# Allegro board hotpixel-routed.brd
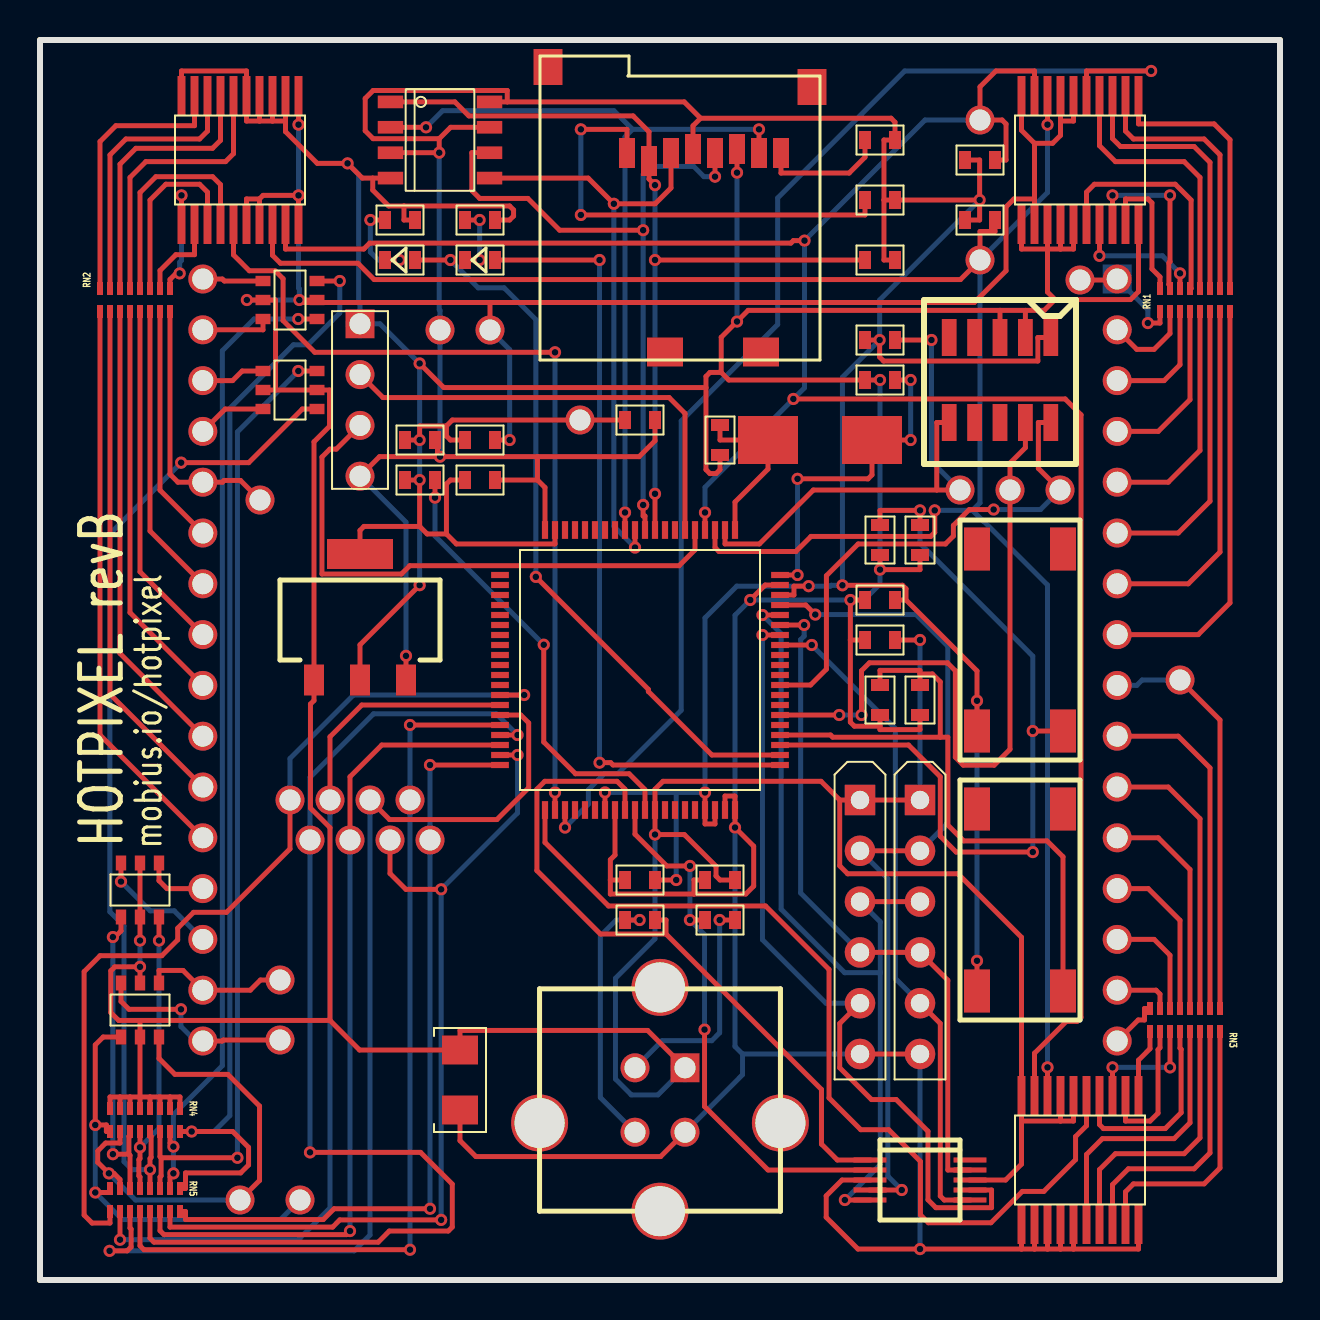
[diagram p0: board, top side]
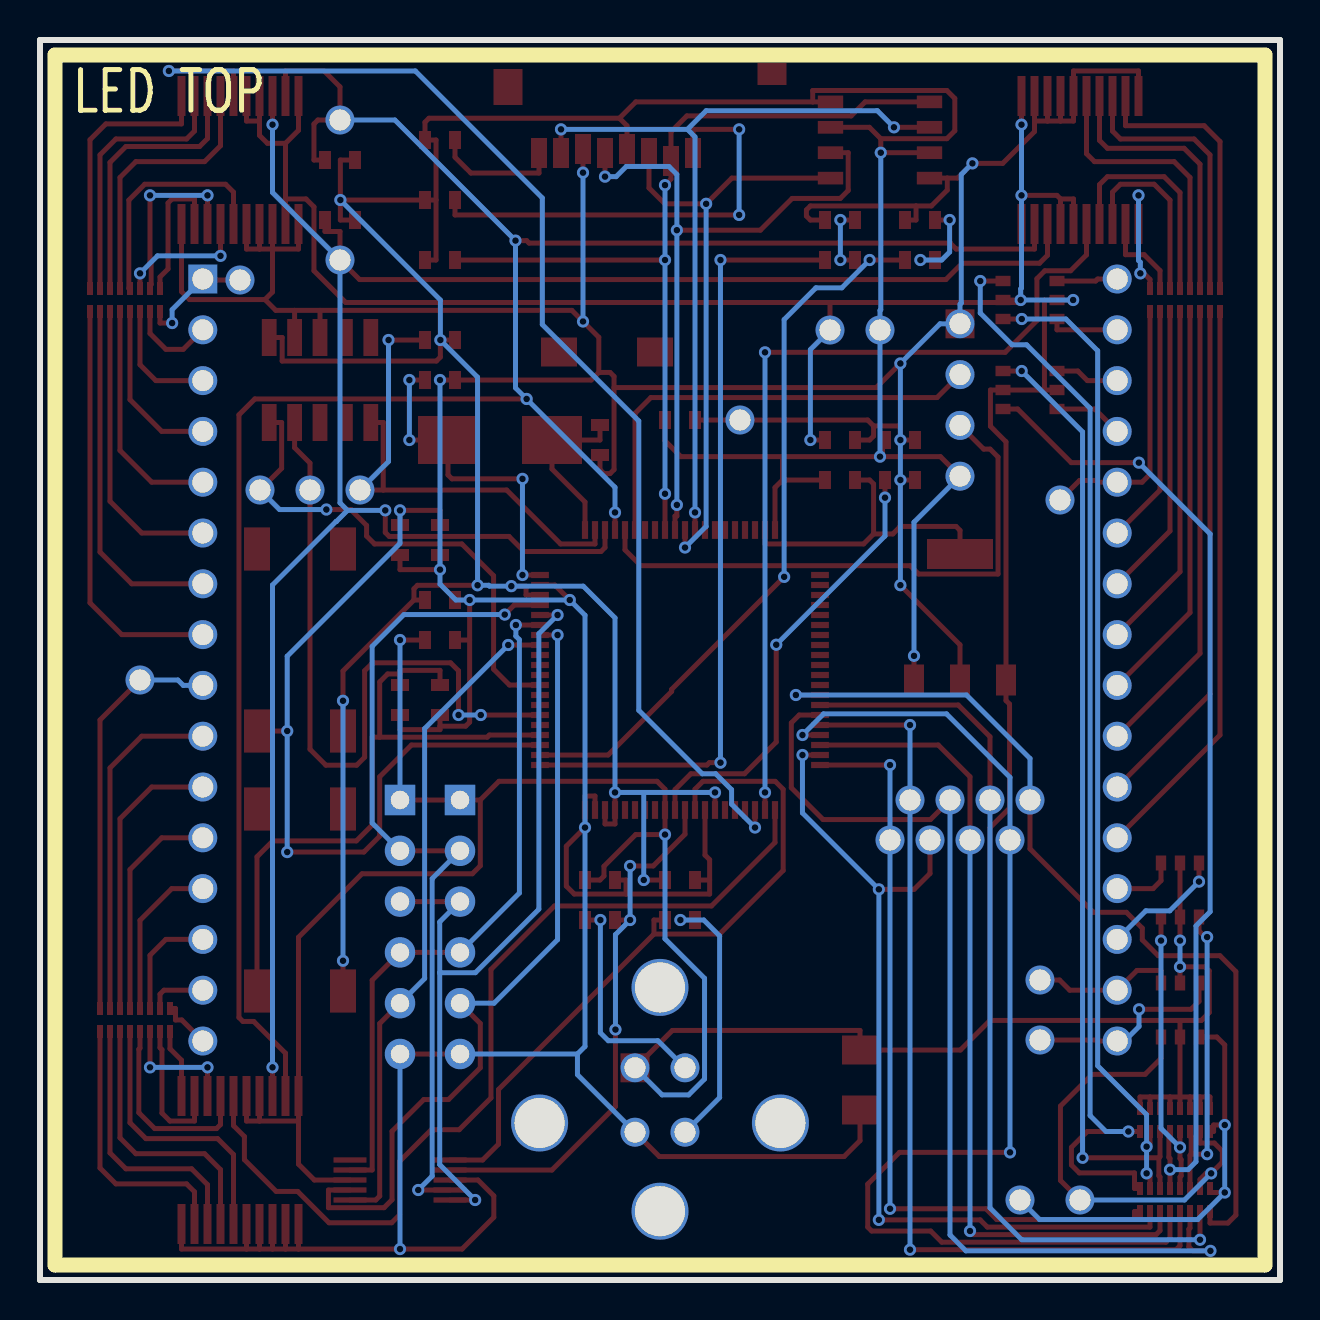
[diagram p1: board, bottom side, seen from below]

Outline 62 x 62 mm; copper layers: TOP, BOTTOM. Coordinates in mm from the lower left corner of the outline.
Outline path: 0,62 62,62 62,0 0,0 0,62

## Design rules (mm)
nets with their own width: min track width 0.37; nets 0 3V3 5V0

## Placement (name value [footprint] x y rotation side)
C1  1u  [C0603]  34 20 0 top
C2  1u  [C0603]  30 20 0 top
C3  1u  [C0603]  22 42 0 top
C4  1u  [C0603]  30 43 0 top
C5  1u  [C0603]  42 32 0 top
C6  1u  [C0603]  22 40 0 top
C7  0.1u  [C0603]  42 34 0 top
C8  0.1u  [C0603]  19 42 0 top
C9  1u  [C0603]  19 40 0 top
C10  0.1u  [C0603]  44 29 270 top
C11  0.1u  [C0603]  44 37 270 top
C12  22pF  [C0603]  42 45 180 top
C13  22pF  [C0603]  34 42 270 top
C14  10uF  [1206]  21 10 90 top
D1  GTM2088ARG-21  [GTM2088ARG21]  31 31 180 bottom
D7  LED  [D0603]  22 51 0 top
D8  LED  [D0603]  18 51 0 top
J2  SWD  [2X5_50MIL_JTAG]  48 45 0 top
J3  ADC  [4SIP]  16 44 0 top
J4  SPI_IN  [SIP6]  44 24 0 top
J5  SPI_OUT  [SIP6]  41 24 0 top
Q5  SI3911DV  [6TSOP]  5 13.5 90 top
Q6  SI3911DV  [6TSOP]  5 19.5 90 top
Q7  SI3911DV  [6TSOP]  12.5 44.5 180 top
Q8  SI3911DV  [6TSOP]  12.5 49 180 top
R1  2.2k  [R0603]  47 56 0 top
R2  2.2k  [R0603]  47 53 0 top
R3  10k  [R0603]  42 47 0 top
R4  300  [R0603]  22 53 0 top
R5  300  [R0603]  18 53 0 top
R6  10k  [R0603]  42 29 270 top
R7  10k  [R0603]  42 37 270 top
R8  33  [R0603]  30 18 0 top
R9  33  [R0603]  34 18 0 top
R11  10k  [R0603]  42 57 0 top
R12  10k  [R0603]  42 51 0 top
R13  10k  [R0603]  42 54 0 top
RN1  56  [741X163]  56 49 90 top
RN2  56  [741X163]  3 49 90 top
RN3  100  [741X163]  59 13 270 top
RN4  4.7k  [741X163]  7 8 270 top
RN5  4.7k  [741X163]  7 4 270 top
SW1  USER1  [SMT_SW_4A]  49 32 90 top
SW2  USER2  [SMT_SW_4A]  49 19 90 top
TP1  TESTLOOP  [TPA]  12 12 0 top
TP11  TESTLOOP  [TPA]  27 43 0 top
TP12  TESTLOOP  [TPA]  22.5 47.5 0 top
TP13  TESTLOOP  [TPA]  20 47.5 0 top
TP14  TESTLOOP  [TPA]  12 15 0 top
TP15  TESTLOOP  [TPA]  57 30 0 top
TP16  TESTLOOP  [TPA]  11 39 0 top
TP17  TESTLOOP  [TPA]  52 50 0 top
TP18  TESTLOOP  [TPA]  10 4 0 top
TP19  TESTLOOP  [TPA]  13 4 0 top
TP20  TESTLOOP  [TPA]  47 58 0 top
TP21  TESTLOOP  [TPA]  47 51 0 top
TP22  TESTLOOP  [TPA]  19.5 22 0 top
TP23  TESTLOOP  [TPA]  17.5 22 0 top
TP24  TESTLOOP  [TPA]  15.5 22 0 top
TP25  TESTLOOP  [TPA]  13.5 22 0 top
TP26  TESTLOOP  [TPA]  18.5 24 0 top
TP27  TESTLOOP  [TPA]  16.5 24 0 top
TP28  TESTLOOP  [TPA]  14.5 24 0 top
TP29  TESTLOOP  [TPA]  12.5 24 0 top
TP30  TESTLOOP  [TPA]  51 39.5 0 top
TP31  TESTLOOP  [TPA]  48.5 39.5 0 top
TP32  TESTLOOP  [TPA]  46 39.5 0 top
U3  PCA9634PW-TSSOP20  [20TSSOP]  52 6 90 top
U4  PCA9634PW-TSSOP20  [20TSSOP]  10 56 270 top
U5  PCA9634PW-TSSOP20  [20TSSOP]  52 56 90 top
U6  MKL25Z128-80LQFP  [80LQFP]  30 30.5 90 top
U7  LM3940IMP-3.3-SOT-223-3  [SOT-223]  16 30 0 top
U8  USB_B-5788336  [5788336]  31 9 0 top
U10  25XX020-8SOIC  [8SOIC]  20 57 0 top
U11  AMP-101-00660-68-6  [AMP101_00660]  25 46 0 top
U12  PRTR5V0U8S-SOT552-1  [SOT-552-1]  44 5 0 top
X1  8MHz  [SMD2_5_0X3_2MM]  39 42 0 top

## Library data of the parts
C1-C14 = C
D1 = GTM2088ARG-21
D7 D8 = LED
J2 = CON10A
J3 = CON4
J4 J5 = CON6
Q5-Q8 = SI3911DV
R1-R9 R11-R13 = R
RN1-RN5 = R-PACK_0
SW1 SW2 = SW PUSHBUTTON-SPST
TP1 TP11-TP32 = TPA_0
U3-U5 = PCA9634PW-TSSOP20
U6 = MKL25Z128-80LQFP
U7 = LM3940IMP-3.3-SOT-223-3
U8 = USB_B-5788336
U10 = 25XX020-8SOIC
U11 = AMP-101-00660-68-6
U12 = PRTR5V0U8S-SOT552-1
X1 = QZP100K

## Footprints (pads in the part's own frame, mm; a bottom-side part is the same pattern mirrored in y, then rotated)
2X5_50MIL_JTAG
  round 0 hole 1.1 unplated: (-1.9,0) (1.9,0)
  rect 0.74x1.85 smd: 1(2.54,2.125) 2(2.54,-2.125) 3(1.27,2.125) 4(1.27,-2.125) 5(0,2.125) 6(0,-2.125) 7(-1.27,2.125) 8(-1.27,-2.125) 9(-2.54,2.125) 10(-2.54,-2.125)
4SIP
  rect 1.45x1.45 hole 1.05: 1(0,3.81)
  round 1.45 hole 1.05: 2(0,1.27) 3(0,-1.27) 4(0,-3.81)
6TSOP
  rect 0.75x0.52 smd: 1(-1.35,0.95) 2(-1.35,0) 3(-1.35,-0.95) 4(1.35,-0.95) 5(1.35,0) 6(1.35,0.95)
8SOIC
  rect 1.27x0.635 smd: 1(-2.477,1.905) 2(-2.477,0.635) 3(-2.477,-0.635) 4(-2.477,-1.905) 5(2.477,-1.905) 6(2.477,-0.635) 7(2.477,0.635) 8(2.477,1.905)
20TSSOP
  rect 2x0.4 smd: 1(-3.2,2.925) 2(-3.2,2.275) 3(-3.2,1.625) 4(-3.2,0.975) 5(-3.2,0.325) 6(-3.2,-0.325) 7(-3.2,-0.975) 8(-3.2,-1.625) 9(-3.2,-2.275) 10(-3.2,-2.925) 11(3.2,-2.925) 12(3.2,-2.275) 13(3.2,-1.625) 14(3.2,-0.975) 15(3.2,-0.325) 16(3.2,0.325) 17(3.2,0.975) 18(3.2,1.625) 19(3.2,2.275) 20(3.2,2.925)
80LQFP
  rect 0.89x0.31 smd: 1(-7,4.75) 2(-7,4.25) 3(-7,3.75) 4(-7,3.25) 5(-7,2.75) 6(-7,2.25) 7(-7,1.75) 8(-7,1.25) 9(-7,0.75) 10(-7,0.25) 11(-7,-0.25) 12(-7,-0.75) 13(-7,-1.25) 14(-7,-1.75) 15(-7,-2.25) 16(-7,-2.75) 17(-7,-3.25) 18(-7,-3.75) 19(-7,-4.25) 20(-7,-4.75) 41(7,-4.75) 42(7,-4.25) 43(7,-3.75) 44(7,-3.25) 45(7,-2.75) 46(7,-2.25) 47(7,-1.75) 48(7,-1.25) 49(7,-0.75) 50(7,-0.25) 51(7,0.25) 52(7,0.75) 53(7,1.25) 54(7,1.75) 55(7,2.25) 56(7,2.75) 57(7,3.25) 58(7,3.75) 59(7,4.25) 60(7,4.75)
  rect 0.31x0.89 smd: 21(-4.75,-7) 22(-4.25,-7) 23(-3.75,-7) 24(-3.25,-7) 25(-2.75,-7) 26(-2.25,-7) 27(-1.75,-7) 28(-1.25,-7) 29(-0.75,-7) 30(-0.25,-7) 31(0.25,-7) 32(0.75,-7) 33(1.25,-7) 34(1.75,-7) 35(2.25,-7) 36(2.75,-7) 37(3.25,-7) 38(3.75,-7) 39(4.25,-7) 40(4.75,-7) 61(4.75,7) 62(4.25,7) 63(3.75,7) 64(3.25,7) 65(2.75,7) 66(2.25,7) 67(1.75,7) 68(1.25,7) 69(0.75,7) 70(0.25,7) 71(-0.25,7) 72(-0.75,7) 73(-1.25,7) 74(-1.75,7) 75(-2.25,7) 76(-2.75,7) 77(-3.25,7) 78(-3.75,7) 79(-4.25,7) 80(-4.75,7)
741X163
  rect 0.65x0.3 smd: 1(-0.575,0) 2(-0.575,-0.5) 3(-0.575,-1) 4(-0.575,-1.5) 5(-0.575,-2) 6(-0.575,-2.5) 7(-0.575,-3) 8(-0.575,-3.5) 9(0.575,-3.5) 10(0.575,-3) 11(0.575,-2.5) 12(0.575,-2) 13(0.575,-1.5) 14(0.575,-1) 15(0.575,-0.5) 16(0.575,0)
1206
  rect 1.45x1.8 smd: 1(-1.5,0) 2(1.5,0)
5788336
  round 2.85 hole 2.5: (-6.02,-1.15) (0,5.63) (0,-5.56) (6.02,-1.15)
  rect 1.45x1.45 hole 1.05: 1(1.25,1.61)
  round 1.45 hole 1.05: 2(-1.25,1.61) 3(-1.25,-1.61) 4(1.25,-1.61)
AMP101_00660
  rect 1.45x1.8 smd: (0.4,14.65) (13.6,13.65)
  rect 0.8x1.5 smd: 1(4.35,10.35) 2(5.45,9.95) 3(6.55,10.35) 4(7.65,10.55) 5(8.75,10.35) 6(9.85,10.55) 7(10.95,10.35) 8(12.05,10.35)
  rect 1.8x1.45 smd: 9(6.25,0.4) 10(11.05,0.4)
C0603
  rect 0.6x0.9 smd: 1(-0.75,0) 2(0.75,0)
D0603
  rect 0.6x0.9 smd: 1(-0.75,0) 2(0.75,0)
GTM2088ARG21
  round 1.45 hole 1.05: 1(-22.86,19.05) 2(-22.86,16.51) 3(-22.86,13.97) 4(-22.86,11.43) 5(-22.86,8.89) 6(-22.86,6.35) 7(-22.86,3.81) 8(-22.86,1.27) 9(-22.86,-1.27) 10(-22.86,-3.81) 11(-22.86,-6.35) 12(-22.86,-8.89) 13(-22.86,-11.43) 14(-22.86,-13.97) 15(-22.86,-16.51) 16(-22.86,-19.05) 17(22.86,-19.05) 18(22.86,-16.51) 19(22.86,-13.97) 20(22.86,-11.43) 21(22.86,-8.89) 22(22.86,-6.35) 23(22.86,-3.81) 24(22.86,-1.27) 25(22.86,1.27) 26(22.86,3.81) 27(22.86,6.35) 28(22.86,8.89) 29(22.86,11.43) 30(22.86,13.97) 31(22.86,16.51) 32(22.86,19.05)
R0603
  rect 0.6x0.9 smd: 1(-0.75,0) 2(0.75,0)
SIP6
  rect 1.524x1.524 hole 0.914: 1(0,0)
  round 1.524 hole 0.914: 2(0,-2.54) 3(0,-5.08) 4(0,-7.62) 5(0,-10.16) 6(0,-12.7)
SMD2_5_0X3_2MM
  rect 3x2.4 smd: 1(2.6,0) 2(-2.6,0)
SMT_SW_4A
  rect 2.16x1.3 smd: (4.55,2.15) (4.55,-2.15) 1(-4.55,2.15) 2(-4.55,-2.15)
SOT-223
  rect 1x1.55 smd: 1(-2.3,0) 2(0,0) 3(2.3,0)
  rect 3.3x1.5 smd: 4(0,6.3)
SOT-552-1
  rect 1.65x0.264 smd: 1(-2.5,1) 2(-2.5,0.5) 3(-2.5,0) 4(-2.5,-0.5) 5(-2.5,-1) 6(2.5,-1) 7(2.5,-0.5) 8(2.5,0) 9(2.5,0.5) 10(2.5,1)
TPA
  round 1.45 hole 1.05: 1(0,0)

## Nets
3V3: C2.2 C4.2 C6.2 C7.2 C8.2 J2.1 J3.4 R1.1 R2.1 R3.1 R11.2 R12.2 R13.2 SW1.1 SW2.1 TP13.1 U6.7(VDD_1) U6.17(VDDA) U6.18(VREFH) U6.38(VDD_2) U6.60(VDD_3) U7.3(OUT) U10.3(/WP) U10.7(/HOLD) U10.8(VDD) U11.4(VDD)
5V0: C1.2 C3.2 C5.2 C14.2 J4.1 J5.1 Q5.2(S2) Q5.5(S1) Q6.2(S2) Q6.5(S1) Q7.2(S2) Q7.5(S1) Q8.2(S2) Q8.5(S1) RN4.1 RN4.2 RN4.3 RN4.4 RN4.5 RN4.6 RN4.7 RN4.8 TP12.1 U3.16(A5) U3.17(A6) U3.20(VDD) U4.1(A0) U4.16(A5) U4.17(A6) U4.20(VDD) U5.2(A1) U5.16(A5) U5.17(A6) U5.20(VDD) U6.12(VREGIN) U7.1(IN) U8.1(5V) U12.8(VCC)
0: C1.1 C2.1 C3.1 C4.1 C5.1 C6.1 C7.1 C8.1 C9.1 C10.2 C11.2 C12.2 C13.2 C14.1 J2.3 J2.5 J3.1 J4.6 J5.6 R4.2 R5.2 R6.2 R7.2 TP11.1 U3.1(A0) U3.2(A1) U3.3(A2) U3.4(A3) U3.5(A4) U3.10(VSS) U4.2(A1) U4.3(A2) U4.4(A3) U4.5(A4) U4.10(VSS) U5.1(A0) U5.3(A2) U5.4(A3) U5.5(A4) U5.10(VSS) U6.8(VSS_1) U6.19(VREFL) U6.20(VSSA) U6.39(VSS_2) U6.59(VSS_3) U7.2(GND_1) U7.4(GND_2) U8.4(GND) U10.4(VSS) U11.6(VSS) U12.3(GND)
B1: RN1.13 U5.6(LED0)
B2: RN1.14 U5.7(LED1)
B3: RN1.15 U5.8(LED2)
B4: RN1.16 U5.9(LED3)
B5: RN1.9 U5.11(LED4)
B6: RN1.10 U5.12(LED5)
B7: RN1.11 U5.13(LED6)
B8: RN1.12 U5.14(LED7)
B_OE: U5.15(/OE) U6.3(PTE2)
G1: RN2.13 U4.6(LED0)
G2: RN2.14 U4.7(LED1)
G3: RN2.15 U4.8(LED2)
G4: RN2.16 U4.9(LED3)
G5: RN2.9 U4.11(LED4)
G6: RN2.10 U4.12(LED5)
G7: RN2.11 U4.13(LED6)
G8: RN2.12 U4.14(LED7)
G_OE: U4.15(/OE) U6.2(PTE1)
I2C0_SCL: R2.2 TP21.1 U3.18(SCL) U4.18(SCL) U5.18(SCL) U6.43(PTBO)
I2C0_SDA: R1.2 TP20.1 U3.19(SDA) U4.19(SDA) U5.19(SDA) U6.44(PTB1)
LED1: D7.2(ANODE) U6.21(PTE29)
LED2: D8.2(ANODE) U6.22(PTE30)
R1: RN3.13 U3.6(LED0)
R2: RN3.14 U3.7(LED1)
R3: RN3.15 U3.8(LED2)
R4: RN3.16 U3.9(LED3)
R5: RN3.9 U3.11(LED4)
R6: RN3.10 U3.12(LED5)
R7: RN3.11 U3.13(LED6)
R8: RN3.12 U3.14(LED7)
R_OE: U3.15(/OE) U6.1(PTE0)
RD1: D1.17(ROW1) Q5.6(D1) TP1.1
RD2: D1.18(ROW2) Q5.4(D2) TP14.1
RD3: D1.19(ROW3) Q6.6(D1)
RD4: D1.20(ROW4) Q6.4(D2)
RD5: D1.29(ROW5) Q7.6(D1)
RD6: D1.30(ROW6) Q7.4(D2)
RD7: D1.31(ROW7) Q8.6(D1)
RD8: D1.32(ROW8) Q8.4(D2)
ROW1: RN5.9 TP29.1 U6.73(PTD0)
ROW2: RN5.10 TP28.1 U6.74(PTD1)
ROW3: RN5.11 TP27.1 U6.75(PTD2)
ROW4: RN5.12 TP26.1 U6.76(PTD3)
ROW5: RN5.13 TP25.1 U6.77(PTD4)
ROW6: RN5.14 TP24.1 U6.78(PTD5)
ROW7: RN5.15 TP23.1 U6.79(PTD6)
ROW8: RN5.16 TP22.1 U6.80(PTD7)
SPI0_MISO: J4.2 J5.2 U6.37(PTA17) U12.4(ESD3)
SPI0_MOSI: J4.3 J5.3 U6.36(PTA16) U12.5(ESD4)
SPI0_PCS0: J5.5 U6.34(PTA14) U12.7(ESD6)
SPI0_SCK: J4.4 J5.4 U6.35(PTA15) U12.9(ESD7)
SPI0_SL_EN: J4.5 U6.33(PTA13) U12.6(ESD5)
SPI1_MISO: U6.52(PTB17) U10.2(SO) U11.7(DAT0)
SPI1_MOSI: U6.51(PTB16) U10.5(SI) U11.3(CMD)
SPI1_PCS0: R12.1 U6.49(PTB10) U10.1(/CE) U11.2(CD/DAT3)
SPI1_SCK: U6.50(PTB11) U10.6(SCK) U11.5(CLK)
SW1: C11.1 R7.1 SW1.2 U6.23(PTE31)
SW2: C10.1 R6.1 SW2.2 U6.24(PTE24)
SWD_CLK: J2.4 TP31.1 U6.26(PTA0)
SWD_DIO: J2.2 TP30.1 U6.29(PTA3)
SWD_RST: J2.10 R3.2 TP32.1 U6.42(RESET_B)
N01486: D1.9(RCOL1) RN3.1 TP15.1
N01490: D1.10(RCOL2) RN3.2
N01494: D1.11(RCOL3) RN3.3
N01498: D1.12(RCOL4) RN3.4
N01508: D1.13(RCOL5) RN3.5
N01512: D1.14(RCOL6) RN3.6
N01516: D1.15(RCOL7) RN3.7
N01520: D1.16(RCOL8) RN3.8
N01524: D1.28(GCOL1) RN2.8 TP16.1
N01528: D1.27(GCOL2) RN2.7
N01532: D1.26(GCOL3) RN2.6
N01536: D1.25(GCOL4) RN2.5
N01546: D1.24(GCOL5) RN2.4
N01550: D1.23(GCOL6) RN2.3
N01554: D1.22(GCOL7) RN2.2
N01558: D1.21(GCOL8) RN2.1
N01562: D1.1(BCOL1) RN1.1 TP17.1
N01566: D1.2(BCOL2) RN1.2
N01570: D1.3(BCOL3) RN1.3
N01574: D1.4(BCOL4) RN1.4
N01578: D1.5(BCOL5) RN1.5
N01582: D1.6(BCOL6) RN1.6
N01586: D1.7(BCOL7) RN1.7
N01590: D1.8(BCOL8) RN1.8
N13286: Q8.3(G2) RN4.16 RN5.1
N13290: Q8.1(G1) RN4.15 RN5.2
N13294: Q7.3(G2) RN4.14 RN5.3
N13298: Q7.1(G1) RN4.13 RN5.4
N13302: Q6.3(G2) RN4.12 RN5.5
N13306: Q6.1(G1) RN4.11 RN5.6
N13310: Q5.3(G2) RN4.10 RN5.7 TP18.1
N13314: Q5.1(G1) RN4.9 RN5.8 TP19.1
N16518: R8.1 U8.3(D+)
N16525: R9.2 U8.2(D-)
N70018: R8.2 U6.9(USB0_DP) U12.1(ESD1)
N70034: R9.1 U6.10(USB0_DM) U12.2(ESD2)
N74543: C9.2 U6.11(VOUT33)
N77664: D7.1(CATHODE) R4.1
N77907: D8.1(CATHODE) R5.1
N80166: C13.1 U6.41(PTA19) X1.2
N80173: C12.1 U6.40(PTA18) X1.1
N80866: J3.3 U6.45(PTB2)
N80884: J3.2 U6.46(PTB3)
N107739: R11.1 U11.8(DAT1)
N107753: R13.1 U11.1(DAT2)

Pads without a net: J2 6 7 8 9; U6 4 5 6 13 14 15 16 25 27 28 30 31 32 47 48 53 54 55 56 57 58 61 62 63 64 65 66 67 68 69 70 71 72; U11 9 10; U12 10

## Via types
v1: diameter 0.61, hole 0.33, TOP to BOTTOM, 130 vias

## Routing (per net, layer and track width the routed paths; a pad name or vN(x,y) marks a point on that pad's centre or on a via; arc(x,y) is an arc through that point)
3V3: length 201.3
  TOP w0.25: J2.1 49.89,47.12 49.89,45.95 42.18,45.95 41.98,46.15 v1(41.98,47) R3.1 ; C2.2 v1(31.81,20) ; R1.1 46.98,56 v1(46.98,54) ; U7.3 v1(18.3,31.21) ; 43.3,34 46.85,30.45 v1(46.85,28.96) SW1.1 ; 43.3,34 43.3,34.56 43.13,34.74 v1(40.12,34.74) ; 43.3,34 C7.2 ; SW2.1 v1(46.85,15.96) ; U10.8 23.36,58.91 ; 23.36,58.91 23.36,59.47 16.66,59.47 16.26,59.08 16.26,57.46 16.66,57.07 19.96,57.07 ; 23.36,58.91 32.21,58.91 33.03,58.09 ; 42.2,54 42.2,57 R11.2 42.75,57.89 42.55,58.09 33.03,58.09 ; 42.2,54 42.2,51 R12.2 ; 42.2,54 R13.2 v1(46.98,54) ; 24.87,41.17 24.87,40 ; 24.87,41.17 29.96,41.17 30.75,41.96 C4.2 ; 24.87,41.17 v1(20,41.17) 19.88,41.17 ; 24.87,40 C6.2 ; 24.87,40 25.25,39.62 U6.60 ; U6.7 v1(28.25,24.38) ; 19.96,57.07 v1(19.96,56.36) U10.3 ; 19.96,57.07 20.53,57.64 U10.7 ; R2.1 46.98,53 v1(46.98,54) ; 19.88,41.17 16.98,41.17 J3.4 ; 19.88,41.17 19.88,42 C8.2 ; 33.03,58.09 32.65,57.71 U11.4 ; v1(38.43,34.69) 37.7,34.69 37.7,34.25 U6.38 ; v1(33.25,24.38) U6.17 33.25,22.8 33.75,22.8 U6.18
  BOTTOM w0.25: 31.81,24.38 v1(31.81,20) ; 31.81,24.38 v1(28.25,24.38) ; 31.81,24.38 v1(33.25,24.38) 33.25,33.11 34.84,34.69 v1(38.43,34.69) 39.52,34.69 39.56,34.74 v1(40.12,34.74) 40.12,45.14 v1(41.98,47) 41.98,49 v1(46.98,54) ; v1(20,41.17) TP13.1 20,48.48 19.96,48.52 v1(19.96,56.36) ; v1(18.3,31.21) 18.3,37.89 J3.4 ; v1(46.85,28.96) v1(46.85,15.96)
5V0: length 256.7
  TOP w0.25: U8.1 30.38,12.48 21,12.48 C14.2 15.98,11.5 14.5,12.98 ; 51.02,7.95 51.67,7.95 U3.16 ; 51.02,7.95 49.08,7.95 ; 51.02,7.95 U3.17 ; 22.5,48.88 13.09,48.88 v1(12.97,49) Q8.2 ; 22.5,48.88 TP12.1 ; 22.5,48.88 46.71,48.88 48.3,50.46 48.3,53.66 48.7,54.05 49.73,54.05 ; U4.17 10.98,54.05 ; 10.98,54.05 10.32,54.05 U4.16 ; 10.98,54.05 11.15,54.23 v1(12.93,54.23) U4.20 ; Q5.5 v1(5,15.66) 3.74,15.66 3.54,15.46 3.54,13.37 3.93,12.98 5,12.98 ; U5.16 51.67,57.95 51.02,57.95 ; 39.99,24 39.99,20.71 40.38,20.31 45.9,20.31 49.08,17.14 U3.20 49.08,7.95 ; 39.99,24 J5.1 J4.1 ; 39.99,24 39.05,24.93 31.15,24.93 30.75,24.54 U6.12 v1(30.75,22.27) 32.21,22.27 33.8,20.68 33.8,20.2 34,20 C1.2 ; RN4.2 6.5,9.15 ; 6.5,9.15 6,9.15 ; 6.5,9.15 7,9.15 RN4.1 ; C5.2 v1(44,32) ; 14.5,12.98 5,12.98 ; 14.5,12.98 14.5,22.62 13.52,23.6 13.52,28.8 13.7,28.97 U7.1 13.7,41.91 14.48,42.69 14.48,44.5 Q7.2 11.78,44.5 ; 5,12.98 Q5.2 5,9.15 ; 49.73,54.05 49.73,56.83 ; 49.73,54.05 U5.2 ; 11.78,44.5 11.78,49 Q8.5 v1(10.34,49) ; 11.78,44.5 Q7.5 ; 49.73,56.83 50.63,56.83 51.02,57.23 51.02,57.95 ; 49.73,56.83 49.08,57.48 U5.20 ; 49.08,7.95 49.08,5.79 48.28,5 U12.8 ; C3.2 v1(23.48,42) ; U4.1 v1(12.93,57.77) ; 5,9.15 4.5,9.15 ; 5,9.15 5.5,9.15 ; 5,9.15 RN4.5 ; 4.5,9.15 RN4.6 ; 4.5,9.15 4,9.15 ; 51.02,57.95 U5.17 ; v1(5,16.97) Q6.2 Q6.5 ; 6,9.15 RN4.3 ; 6,9.15 5.5,9.15 ; RN4.4 5.5,9.15 ; RN4.8 3.5,9.15 4,9.15 ; RN4.7 4,9.15
  BOTTOM w0.25: U8.1 30.9,9.26 29.57,9.26 28.77,10.05 28.77,15.08 30.75,17.06 v1(30.75,22.27) ; v1(23.48,42) 23.48,46.52 TP12.1 ; v1(44,32) J4.1 ; v1(12.93,57.77) v1(12.93,54.23) 12.93,49.6 12.97,49.56 v1(12.97,49) v1(10.34,49) ; v1(5,15.66) v1(5,16.97)
0: length 312.3
  TOP w0.25: U7.2 16,31.76 v1(18.98,34.74) ; U6.39 36.26,34.75 v1(35.51,34) ; 10.98,57.95 11.62,57.95 ; 10.98,57.95 10.32,57.95 U4.5 10.32,60.45 7.07,60.45 U4.10 ; 10.98,57.95 U4.4 ; 11.62,57.95 12.27,57.95 ; 11.62,57.95 U4.3 ; U7.4 16,37.48 16.2,37.68 18.98,37.68 ; U6.59 25.75,36.8 20.82,36.8 20.32,37.3 ; v1(42,45) C12.2 34.44,45 34.06,45.38 ; C7.1 v1(40.52,34) 40.52,32 ; v1(18.98,45.83) 20.19,44.62 33.3,44.62 ; 16.64,55.09 16.12,55.09 v1(15.38,55.83) 13.86,55.83 12.27,57.42 12.27,57.95 ; 16.64,55.09 16.64,54.5 17.43,53.7 18.2,53.7 ; 16.64,55.09 U10.4 ; 34.06,45.38 34.06,47.14 v1(34.85,47.92) 35.41,48.48 48,48.48 ; 34.06,45.38 33.5,45.38 33.3,45.18 33.3,44.62 ; U6.8 28.75,21.25 28.52,21.02 28.52,20 ; 32.7,19.3 32.7,20 C1.1 ; 32.7,19.3 28.52,19.3 28.52,20 ; 32.7,19.3 35.29,19.3 35.68,19.69 35.68,21.69 v1(34.75,22.62) U6.20 34.75,24.2 34.25,24.2 U6.19 ; 49.08,1.55 v1(44,1.55) 40.9,1.55 39.31,3.14 39.31,4.21 40.1,5 U12.3 ; 49.08,1.55 49.73,1.55 ; 49.08,1.55 U3.1 ; 50.38,51.55 50.38,49.4 50.75,49.02 ; 50.38,51.55 51.02,51.55 ; 50.38,51.55 U5.3 ; 50.38,51.55 49.08,51.55 U5.1 ; 20.32,37.3 20.32,39.8 20.52,40 C6.1 ; 20.32,37.3 19.36,37.3 18.98,37.68 ; 49.27,48.48 48,48.48 ; 49.27,48.48 50.21,48.48 50.75,49.02 ; 49.27,48.48 J2.3 ; 48,48.48 J2.5 ; 33.3,44.62 33.3,40.52 33.5,40.32 33.8,40.32 34,40.52 C13.2 ; C5.1 40.52,32 ; 40.52,32 40.52,27.89 40.72,27.69 42,27.69 ; U3.10 54.92,1.55 51.67,1.55 ; U3.3 50.38,1.55 ; 50.38,1.55 51.02,1.55 ; 50.38,1.55 49.73,1.55 ; U3.5 51.67,1.55 ; 51.67,1.55 51.02,1.55 ; U5.5 51.67,51.55 51.02,51.55 ; 28.52,20 C2.1 ; U3.4 51.02,1.55 ; 49.73,1.55 U3.2 ; C10.2 44,27.52 42,27.52 42,27.69 ; 12.27,57.95 U4.2 ; C4.1 TP11.1 20.62,43 20.32,42.7 ; 51.02,51.55 U5.4 ; U11.6 v1(34.85,55.37) ; 18.98,37.68 v1(18.98,40) C9.1 ; 18.2,53.7 23.48,53.7 23.68,53.5 23.68,53.2 23.48,53 R4.2 ; 18.2,53.7 18.2,53 R5.2 ; 50.75,49.02 54.53,49.02 54.92,49.42 U5.10 ; 42,27.69 R6.2 ; C11.2 44,35.52 v1(42,35.52) R7.2 ; J5.6 J4.6 ; C3.1 20.52,42 20.32,42.2 20.32,42.7 ; 20.32,42.7 18.98,42.7 v1(18.98,42) C8.1 ; C14.1 21,6.97 21.79,6.17 31.03,6.17 U8.4
  BOTTOM w0.25: v1(42,45) v1(42,35.52) 42,34.79 41.21,34 v1(40.52,34) v1(35.51,34) 34.75,33.24 v1(34.75,22.62) 34.75,11.68 35.13,11.3 ; 35.13,11.3 35.13,10.27 U8.4 ; 35.13,11.3 J5.6 ; v1(34.85,47.92) v1(34.85,55.37) ; v1(44,1.55) J4.6 ; v1(18.98,34.74) v1(18.98,40) v1(18.98,42) v1(18.98,45.83) 17,47.81 J3.1 16,48.79 15.94,48.85 15.94,55.27 v1(15.38,55.83)
B1: length 11.8
  TOP w0.25: RN1.13 57.56,49.58 57.56,53.99 56.76,54.79 52.72,54.79 52.33,54.39 U5.6
B2: length 6.7
  TOP w0.25: U5.7 v1(52.98,51.21) ; RN1.14 v1(57,50.33)
  BOTTOM w0.25: v1(57,50.33) 56.12,51.21 v1(52.98,51.21)
B3: length 9
  TOP w0.25: RN1.15 56.5,49.77 56.44,49.77 56.44,50.86 56.5,50.92 v1(56.5,54.23) ; U5.8 v1(53.62,54.23)
  BOTTOM w0.25: v1(53.62,54.23) v1(56.5,54.23)
B4: length 7.1
  TOP w0.25: RN1.16 56,50.15 55.6,50.55 55.6,53.85 55.4,54.05 54.27,54.05 U5.9
B5: length 13.7
  TOP w0.25: RN1.9 59.5,57.01 58.71,57.8 54.92,57.8 U5.11
B6: length 13.7
  TOP w0.25: RN1.10 59,56.26 58.21,57.05 54.67,57.05 54.27,57.45 U5.12
B7: length 13.8
  TOP w0.25: RN1.11 58.5,55.88 57.71,56.67 54.02,56.67 53.62,57.07 U5.13
B8: length 13.7
  TOP w0.25: U5.14 52.98,56.71 53.77,55.92 57.21,55.92 58,55.13 RN1.12
B_OE: length 62.9
  TOP w0.25: U6.3 v1(26.25,22.62) ; v1(55.56,60.45) 52.33,60.45 U5.15
  BOTTOM w0.25: v1(55.56,60.45) 43.23,60.45 36.88,54.1 36.88,47.77 32.06,42.95 32.06,28.49 28.89,25.31 28.21,25.31 27.42,24.52 27.42,23.79 v1(26.25,22.62)
G1: length 14.1
  TOP w0.25: U4.6 9.68,56.32 9.28,55.92 5.29,55.92 4.5,55.13 RN2.13
G2: length 14
  TOP w0.25: U4.7 9.02,56.98 8.63,56.59 4.79,56.59 4,55.79 RN2.14
G3: length 13.8
  TOP w0.25: RN2.15 3.5,56.26 4.29,57.05 7.98,57.05 8.38,57.45 U4.8
G4: length 13.9
  TOP w0.25: U4.9 7.73,57.72 3.79,57.72 3,56.92 RN2.16
G5: length 6.4
  TOP w0.25: RN2.9 6.5,50.03 6.8,50.33 v1(6.98,50.33) ; U4.11 v1(7.07,54.23)
  BOTTOM w0.25: v1(7.07,54.23) 7.07,50.98 6.98,50.89 v1(6.98,50.33)
G6: length 4.5
  TOP w0.25: U4.12 7.73,51.27 6.79,51.27 6,50.47 RN2.10
G7: length 9.4
  TOP w0.25: RN2.11 5.5,53.99 6.29,54.79 7.98,54.79 8.38,54.39 U4.13
G8: length 11.3
  TOP w0.25: RN2.12 5,54.37 5.79,55.17 8.63,55.17 9.02,54.77 U4.14
G_OE: length 43.7
  TOP w0.25: U4.15 9.68,51.26 10.47,50.46 11.76,50.46 12.15,50.07 12.15,47.97 13.74,46.38 v1(25.75,46.38) ; U6.2 v1(25.75,24.38)
  BOTTOM w0.25: v1(25.75,46.38) v1(25.75,24.38)
I2C0_SCL: length 109
  TOP w0.25: U3.18 v1(50.38,10.63) ; U6.43 33.75,36.62 33.95,36.43 37.8,36.43 38.55,37.18 44.54,37.18 44.74,37.38 v1(44.74,38.48) ; U5.18 v1(50.38,57.77) ; U4.18 11.62,51.24 12.02,50.84 15.89,50.84 16.71,50.02 46.02,50.02 TP21.1 47,52.43 47.75,52.43 R2.2
  BOTTOM w0.25: v1(50.38,10.63) 50.38,34.75 47.2,37.93 47.18,37.93 46.62,38.48 ; 46.62,38.48 47,38.86 TP21.1 50.38,54.38 v1(50.38,57.77) ; 46.62,38.48 v1(44.74,38.48)
I2C0_SDA: length 114.9
  TOP w0.25: U6.44 v1(33.25,38.38) ; v1(38.23,51.97) 37.67,51.97 37.54,51.84 16.49,51.84 16.19,51.55 12.27,51.55 U4.19 ; R1.2 48.3,56 48.3,57.8 48.1,58 TP20.1 47,59.66 47.79,60.45 49.73,60.45 U5.19 ; U3.19 49.73,11.34 51.31,12.93 51.85,12.93 52.05,13.13 52.05,43.26 51.26,44.05 v1(37.67,44.05)
  BOTTOM w0.25: v1(33.25,38.38) 33.25,39.63 v1(37.67,44.05) 38.23,44.61 v1(38.23,51.97) 44.26,58 TP20.1
LED1: length 39.4
  TOP w0.25: v1(27.98,25.87) 28.53,25.87 28.65,25.75 U6.21 ; D7.2 v1(27.98,51)
  BOTTOM w0.25: v1(27.98,51) v1(27.98,25.87)
LED2: length 36.1
  TOP w0.25: v1(24.79,35.16) 30.42,29.53 30.42,29.43 33.59,26.25 U6.22 ; D8.2 v1(20.52,51)
  BOTTOM w0.25: v1(20.52,51) 21.91,49.61 23.21,49.61 24.79,48.02 v1(24.79,35.16)
R1: length 13.9
  TOP w0.25: U3.6 52.33,6.27 53.12,7.07 56.71,7.07 57.5,7.86 RN3.13
R2: length 13.7
  TOP w0.25: RN3.14 58,7.11 57.21,6.31 53.77,6.31 52.98,5.52 U3.7
R3: length 13.6
  TOP w0.25: RN3.15 58.5,6.35 57.71,5.56 54.42,5.56 53.62,4.77 U3.8
R4: length 13.7
  TOP w0.25: RN3.16 59,5.6 58.21,4.81 54.67,4.81 54.27,4.41 U3.9
R5: length 3.5
  TOP w0.25: RN3.9 55.5,11.57 54.92,10.99 U3.11
R6: length 7.2
  TOP w0.25: RN3.10 56,11.61 55.9,11.52 55.9,8.34 55.51,7.95 54.27,7.95 U3.12
R7: length 6.1
  TOP w0.25: U3.13 v1(53.62,10.63) ; RN3.11 v1(56.5,10.63)
  BOTTOM w0.25: v1(56.5,10.63) v1(53.62,10.63)
R8: length 10
  TOP w0.25: RN3.12 57,11.59 57.06,11.54 57.06,8.36 56.26,7.57 53.17,7.57 52.98,7.77 U3.14
R_OE: length 46.1
  TOP w0.25: U3.15 52.33,7.72 51.78,7.17 51.78,6.02 50.19,4.43 49.11,4.43 47.55,2.86 44.42,2.86 44.02,3.26 44.02,5.93 42.43,7.52 41.04,7.52 39.45,9.1 39.45,15.53 36.28,18.7 28.43,18.7 25.25,21.88 U6.1
RD1: length 10.2
  TOP w0.25: D1.17 9.12,11.95 9.17,12 TP1.1 ; Q5.6 4.05,13.93 4.45,13.53 v1(7.05,13.53)
  BOTTOM w0.25: D1.17 7.77,11.95 7.05,12.68 v1(7.05,13.53)
RD2: length 7.3
  TOP w0.25: Q5.4 5.95,15.48 7.15,15.48 D1.18 10.51,14.49 11.02,15 TP14.1
RD3: length 6.2
  TOP w0.25: Q6.6 v1(4.05,19.92)
  BOTTOM w0.25: v1(4.05,19.92) 5.51,18.46 6.71,18.46 D1.19
RD4: length 3.2
  TOP w0.25: D1.20 6.35,19.57 5.95,19.97 Q6.4
RD5: length 3.5
  TOP w0.25: D1.29 9.26,43.55 Q7.6
RD6: length 3.2
  TOP w0.25: Q7.4 10.11,45.45 9.63,44.97 D1.30
RD7: length 3.5
  TOP w0.25: Q8.6 11.15,47.51 D1.31
RD8: length 3.1
  TOP w0.25: D1.32 9.12,50.05 9.22,49.95 Q8.4
ROW1: length 46.1
  TOP w0.25: TP29.1 12.5,21.56 9.32,18.38 7.68,18.38 6.88,17.59 6.88,17.01 6.09,16.21 3,16.21 2.21,15.42 2.21,3.24 2.6,2.85 3.5,2.85 RN5.9 ; U6.73 v1(24.21,29.25)
  BOTTOM w0.25: v1(24.21,29.25) 15.68,29.25 12.5,26.07 TP29.1
ROW2: length 45.3
  TOP w0.25: RN5.10 v1(4,2.01) ; U6.74 16.09,28.75 14.5,27.16 TP28.1
  BOTTOM w0.25: TP28.1 14.5,3.6 12.91,2.01 v1(4,2.01)
ROW3: length 51.9
  TOP w0.25: TP27.1 17.48,23.02 22.85,23.02 24.43,24.61 24.43,27.85 24.04,28.25 U6.75 ; RN5.11 4.5,2.6 4.56,2.54 4.56,1.66 4.36,1.46 v1(3.48,1.46)
  BOTTOM w0.25: v1(3.48,1.46) 15.71,1.46 16.5,2.25 TP27.1
ROW4: length 46
  TOP w0.25: v1(18.5,1.52) 5.2,1.52 5,1.71 RN5.12 ; U6.76 v1(18.5,27.75)
  BOTTOM w0.25: v1(18.5,27.75) TP26.1 v1(18.5,1.52)
ROW5: length 58.5
  TOP w0.25: v1(13.5,6.38) 19.03,6.38 20.61,4.79 20.61,2.65 20.42,2.45 17.47,2.45 16.91,1.89 5.7,1.89 5.5,2.09 RN5.13 ; U6.77 v1(23.88,27.25)
  BOTTOM w0.25: v1(23.88,27.25) 22.82,28.31 16.68,28.31 13.5,25.13 TP25.1 v1(13.5,6.38)
ROW6: length 41.5
  TOP w0.25: v1(15.5,2.45) 15.32,2.27 6.2,2.27 6,2.47 RN5.14 ; U6.78 17.09,26.75 15.5,25.16 TP24.1
  BOTTOM w0.25: v1(15.5,2.45) TP24.1
ROW7: length 44.7
  TOP w0.25: v1(20.06,19.53) 18.29,19.53 17.5,20.33 TP23.1 ; U6.79 v1(23.88,26.25) ; RN5.15 6.5,2.65 14.63,2.65 14.99,3.01 v1(20.06,3.01)
  BOTTOM w0.25: v1(23.88,26.25) 23.88,23.35 v1(20.06,19.53) v1(20.06,3.01)
ROW8: length 38.8
  TOP w0.25: U6.80 v1(19.5,25.75) ; v1(19.5,3.56) 14.7,3.56 14.16,3.02 7.27,3.02 7.27,3.43 RN5.16
  BOTTOM w0.25: v1(19.5,3.56) TP22.1 v1(19.5,25.75)
SPI0_MISO: length 42.5
  TOP w0.25: U12.4 v1(43.09,4.5) ; U6.37 38.28,33.75 v1(38.76,33.27) ; J5.2 J4.2
  BOTTOM w0.25: J5.2 42.39,20.07 42.39,5.2 v1(43.09,4.5) ; J4.2 45.39,22.85 45.39,31.68 43.8,33.27 v1(38.76,33.27)
SPI0_MOSI: length 42.6
  TOP w0.25: U6.36 v1(36.12,33.25) ; U12.5 v1(40.24,4) ; J4.3 J5.3
  BOTTOM w0.25: J5.3 42.01,17.91 42.01,15.37 ; 42.01,15.37 40.23,15.37 37.06,18.54 37.06,32.32 v1(36.12,33.25) ; 42.01,15.37 42.01,5.77 v1(40.24,4)
SPI0_PCS0: length 40.4
  TOP w0.25: U6.34 v1(36.12,32.25) ; U12.7 47.58,4.5 47.58,3.62 44.79,3.62 44.4,4.01 44.4,7.44 42.81,9.02 41.57,9.02 39.99,10.61 39.99,12.83 J5.5
  BOTTOM w0.25: J5.5 39.3,13.84 36.12,17.02 v1(36.12,32.25)
SPI0_SCK: length 34.4
  TOP w0.25: U6.35 v1(38.21,32.75) ; U12.9 45.39,5.5 45.39,14.99 J4.4 J5.4
  BOTTOM w0.25: v1(38.21,32.75) 38.21,32.19 38.03,32.02 38.03,19.35 J5.4
SPI0_SL_EN: length 33.4
  TOP w0.25: J4.5 45.01,12.83 45.01,4.2 45.21,4 U12.6 ; U6.33 v1(38.59,31.75)
  BOTTOM w0.25: v1(38.59,31.75) 42.77,27.57 42.77,15.07 J4.5
SPI1_MISO: length 40.5
  TOP w0.25: U11.7 v1(35.95,57.53) ; U6.52 v1(29.25,38.38) ; U10.2 v1(19.3,57.64)
  BOTTOM w0.25: v1(19.3,57.64) 20.13,58.47 28.69,58.47 29.63,57.53 ; v1(29.25,38.38) 29.25,57.15 29.63,57.53 ; 29.63,57.53 v1(35.95,57.53)
SPI1_MOSI: length 30.2
  TOP w0.25: U10.5 27.41,55.09 v1(28.69,53.81) 30.76,53.81 31.55,54.6 U11.3 ; U6.51 v1(29.75,36.62)
  BOTTOM w0.25: v1(28.69,53.81) 28.69,37.68 v1(29.75,36.62)
SPI1_PCS0: length 44.1
  TOP w0.25: U6.49 v1(30.75,39.31) ; R12.1 v1(30.75,51) ; v1(30.75,54.74) 30.75,54.75 30.45,55.05 U11.2 30.45,57.41 29.66,58.2 21.44,58.2 20.74,58.91 U10.1
  BOTTOM w0.25: v1(30.75,39.31) v1(30.75,51) v1(30.75,54.74)
SPI1_SCK: length 35.2
  TOP w0.25: U11.5 v1(33.75,55.17) ; U10.6 21.59,56.36 21.59,54.48 21.99,54.08 24.39,54.08 25.98,52.49 v1(30.16,52.49) ; v1(30.16,38.75) 30.16,38.2 30.25,38.2 U6.50
  BOTTOM w0.25: v1(30.16,38.75) v1(30.16,52.49) 30.16,55.28 30.55,55.68 32.68,55.68 33.19,55.17 v1(33.75,55.17)
SW1: length 41
  TOP w0.25: SW1.2 v1(49.64,27.45) ; v1(49.64,21.4) 45.81,21.4 45.01,22.19 45.01,25.16 43.43,26.75 U6.23 ; C11.1 v1(44,38.48) 42,38.48 R7.1
  BOTTOM w0.25: v1(49.64,21.4) v1(49.64,27.45) 49.64,31.19 44,36.83 v1(44,38.48)
SW2: length 33.4
  TOP w0.25: 45.01,27.14 39.64,27.14 39.53,27.25 U6.24 ; 45.01,27.14 45.01,29.91 44.62,30.3 44,30.3 ; 45.01,27.14 45.39,27.14 45.39,22.75 46.18,21.95 50.36,21.95 51.15,21.16 SW2.2 ; R6.1 42,30.48 44,30.48 44,30.3 ; C10.1 44,30.3
SWD_CLK: length 35.5
  TOP w0.25: v1(41.08,28.25) 41.08,30.46 41.47,30.86 45.37,30.86 45.77,30.46 45.77,26.14 46.16,25.74 47.71,25.74 48.5,26.53 TP31.1 48.5,40.85 49.27,41.62 J2.4 ; U6.26 v1(39.96,28.25)
  BOTTOM w0.25: v1(41.08,28.25) v1(39.96,28.25)
SWD_DIO: length 25.5
  TOP w0.25: U6.29 38.53,29.75 39.32,30.54 39.32,35.21 40.91,36.8 45.27,36.8 45.67,37.2 45.67,37.73 46.46,38.52 v1(47.68,38.52) ; J2.2 49.92,42.88 49.92,40.58 TP30.1
  BOTTOM w0.25: v1(47.68,38.52) 50.02,38.52 TP30.1
SWD_RST: length 27.5
  TOP w0.25: J2.10 44.84,42.88 44.84,39.5 ; 44.84,39.5 38.67,39.5 35.97,36.8 34.25,36.8 U6.42 ; 44.84,39.5 TP32.1 ; R3.2 v1(44.57,47)
  BOTTOM w0.25: TP32.1 44.57,40.93 v1(44.57,47)
N01486: length 20.5
  TOP w0.25: TP15.1 59,28 RN3.1
  BOTTOM w0.25: TP15.1 55.11,30 54.84,29.73 D1.9
N01490: length 17.3
  TOP w0.25: RN3.2 58.5,25.6 56.91,27.19 D1.10
N01494: length 14.3
  TOP w0.25: D1.11 56.41,24.65 58,23.06 RN3.3
N01498: length 11.2
  TOP w0.25: RN3.4 57.5,20.52 55.91,22.11 D1.12
N01508: length 8.2
  TOP w0.25: RN3.5 57,17.98 55.41,19.57 D1.13
N01512: length 5.6
  TOP w0.25: D1.14 55.71,17.03 56.5,16.24 RN3.6
N01516: length 2.9
  TOP w0.25: RN3.7 56,14.29 55.8,14.49 D1.15
N01520: length 2.6
  TOP w0.25: RN3.8 55.23,13.57 55.23,13 54.91,13 D1.16
N01524: length 13.2
  TOP w0.25: TP16.1 10.02,39.98 9.2,39.98 9.12,39.89 D1.28 6.9,39.89 6.5,40.29 RN2.8
N01528: length 12
  TOP w0.25: D1.27 6,39.49 RN2.7
N01532: length 14.7
  TOP w0.25: RN2.6 5.5,37.45 D1.26
N01536: length 17.5
  TOP w0.25: RN2.5 5,35.41 D1.25
N01546: length 20.2
  TOP w0.25: RN2.4 4.5,33.37 D1.24
N01550: length 22.9
  TOP w0.25: D1.23 4,31.33 RN2.3
N01554: length 25.7
  TOP w0.25: RN2.2 3.5,29.29 D1.22
N01558: length 28.4
  TOP w0.25: D1.21 3,27.25 RN2.1
N01562: length 5.9
  TOP w0.25: TP17.1 53.81,50 D1.1 ; v1(55.39,47.85) 56,47.85 RN1.1
  BOTTOM w0.25: D1.1 55.39,48.52 v1(55.39,47.85)
N01566: length 4.5
  TOP w0.25: RN1.2 56.5,47.33 55.71,46.53 54.84,46.53 D1.2
N01570: length 6.1
  TOP w0.25: D1.3 56.21,44.97 57,45.76 RN1.3
N01574: length 8.7
  TOP w0.25: RN1.4 57.5,44.02 55.91,42.43 D1.4
N01578: length 11.7
  TOP w0.25: D1.5 56.41,39.89 58,41.48 RN1.5
N01582: length 14.8
  TOP w0.25: D1.6 56.91,37.35 58.5,38.94 RN1.6
N01586: length 17.8
  TOP w0.25: D1.7 57.41,34.81 59,36.4 RN1.7
N01590: length 20.9
  TOP w0.25: D1.8 57.91,32.27 59.5,33.86 RN1.8
N13286: length 56.8
  TOP w0.25: RN5.1 7.27,4.57 7.27,5.35 10.03,5.35 10.43,5.75 10.43,6.63 9.63,7.43 v1(7.58,7.43) RN4.16 ; Q8.3 v1(14.99,49.95)
  BOTTOM w0.25: v1(14.99,49.95) 14.99,48.35 13.4,46.76 12.67,46.76 9.49,43.59 9.49,8.22 8.7,7.43 v1(7.58,7.43)
N13290: length 49.2
  TOP w0.25: RN4.15 6.5,6.84 v1(6.67,6.67) ; Q8.1 v1(12.91,48.05) ; RN5.2 6.5,5.16 v1(6.67,5.33)
  BOTTOM w0.25: v1(12.91,48.05) 10.7,48.05 9.12,46.46 9.12,10.71 6.67,8.27 v1(6.67,6.67) v1(6.67,5.33)
N13294: length 48.2
  TOP w0.25: Q7.3 v1(12.92,45.45) ; 6.06,6.11 6.06,5.21 6,5.15 RN5.3 ; 6.06,6.11 6,6.17 RN4.14 ; 6.06,6.11 v1(9.87,6.11)
  BOTTOM w0.25: v1(9.87,6.11) 9.87,42.41 v1(12.92,45.45)
N13298: length 49
  TOP w0.25: v1(7.06,40.87) 10.44,40.87 13.12,43.55 Q7.1 ; RN4.13 5.5,7.19 5.56,7.19 5.56,6.13 5.5,6.07 v1(5.5,5.52) RN5.4
  BOTTOM w0.25: v1(5.5,5.52) 4.6,5.52 4.2,5.91 4.2,17.7 3.49,18.41 3.49,37.3 v1(7.06,40.87)
N13302: length 14.8
  TOP w0.25: RN4.12 v1(5,6.63) 5,6.07 4.94,6.02 4.94,5.21 5,5.15 RN5.5 ; Q6.3 v1(5.95,16.97)
  BOTTOM w0.25: v1(5.95,16.97) 5.95,7.58 v1(5,6.63)
N13306: length 15.8
  TOP w0.25: 4.44,6.29 4.5,6.23 RN5.6 ; 4.44,6.29 4.44,7.19 4.5,7.19 RN4.11 ; 4.44,6.29 v1(3.64,6.29) ; v1(3.64,17.15) 3.75,17.15 4.05,17.45 Q6.1
  BOTTOM w0.25: v1(3.64,6.29) v1(3.64,17.15)
N13310: length 23.6
  TOP w0.25: RN5.7 4,5.03 3.7,5.33 v1(3.44,5.33) 2.89,5.89 2.89,6.45 3.28,6.85 4,6.85 RN4.10 ; Q5.3 5.95,11.08 6.74,10.28 9.39,10.28 10.98,8.7 10.98,4.98 TP18.1
  BOTTOM w0.25: v1(3.44,5.33) 4.77,4 TP18.1
N13314: length 22
  TOP w0.25: Q5.1 3.16,12.15 2.76,11.75 v1(2.76,7.75) 3.32,7.75 3.32,7.43 RN4.9 ; v1(2.76,4.38) 3.5,4.38 RN5.8
  BOTTOM w0.25: v1(2.76,7.75) v1(2.76,4.38) 4.12,3.02 12.02,3.02 TP19.1
N16518: length 13.6
  TOP w0.25: R8.1 v1(29.98,18)
  BOTTOM w0.25: U8.3 28.02,9.12 28.02,17.21 28.81,18 v1(29.98,18)
N16525: length 11.4
  TOP w0.25: R9.2 v1(33.98,18)
  BOTTOM w0.25: v1(33.98,18) 33.98,12.36 33.58,11.96 31.1,11.96 U8.2
N70018: length 35.3
  TOP w0.25: 31.3,17.3 31.3,18 R8.2 ; 31.3,17.3 28.02,17.3 24.84,20.47 24.84,24.54 25.24,24.93 28.85,24.93 29.25,24.54 U6.9 ; 31.3,17.3 39.07,9.53 39.07,6.79 39.87,6 U12.1
N70034: length 27.3
  TOP w0.25: v1(33.23,12.52) 33.23,8.68 36.4,5.5 U12.2 ; v1(32.5,20.7) 31.34,20.7 29.75,22.29 U6.10 ; R9.1 v1(32.5,18)
  BOTTOM w0.25: v1(32.5,20.7) v1(32.5,18) 33.23,17.27 v1(33.23,12.52)
N74543: length 22.4
  TOP w0.25: C9.2 v1(19.75,39.12) ; v1(25.19,31.76) 25.19,26.9 26.78,25.31 29.46,25.31 30.25,24.52 U6.11
  BOTTOM w0.25: v1(25.19,31.76) 19.75,37.2 v1(19.75,39.12)
N77664: length 3.5
  TOP w0.25: R4.1 v1(21.98,53) ; D7.1 v1(21.98,51)
  BOTTOM w0.25: v1(21.98,53) v1(21.98,51)
N77907: length 4.7
  TOP w0.25: D8.1 v1(17.98,51) ; R5.1 v1(16.52,53)
  BOTTOM w0.25: v1(17.98,51) 16.92,51 16.52,51.4 v1(16.52,53)
N80166: length 8.3
  TOP w0.25: U6.41 34.75,38.9 36.4,40.55 X1.2 34,42 C13.1
N80173: length 16.9
  TOP w0.25: v1(43.53,42) X1.1 41.6,40.26 41.4,40.06 v1(37.88,40.06) ; U6.40 v1(37.88,35.25) ; C12.1 v1(43.53,45)
  BOTTOM w0.25: v1(37.88,40.06) v1(37.88,35.25) ; v1(43.53,42) v1(43.53,45)
N80866: length 28.6
  TOP w0.25: U6.45 32.75,36.51 31.96,35.71 18.49,35.71 18.07,35.3 14.1,35.3 14.1,41.15 14.49,41.54 14.81,41.54 J3.3
N80884: length 22.9
  TOP w0.25: J3.2 17.15,44.12 31.46,44.12 32.25,43.33 U6.46
N107739: length 6.4
  TOP w0.25: U11.8 37.05,55.35 40.46,55.35 41.25,56.14 R11.1
N107753: length 22.7
  TOP w0.25: v1(27.04,57.53) 29.35,57.53 U11.1 ; R13.1 41.25,53.25 v1(27.04,53.25)
  BOTTOM w0.25: v1(27.04,53.25) v1(27.04,57.53)

## Text on the board
Ref Des/Silkscreen Top: mobius.io/hotpixel | HOTPIXEL revB
